# EAGLE board ppboard (EAGLE 6.5.0)
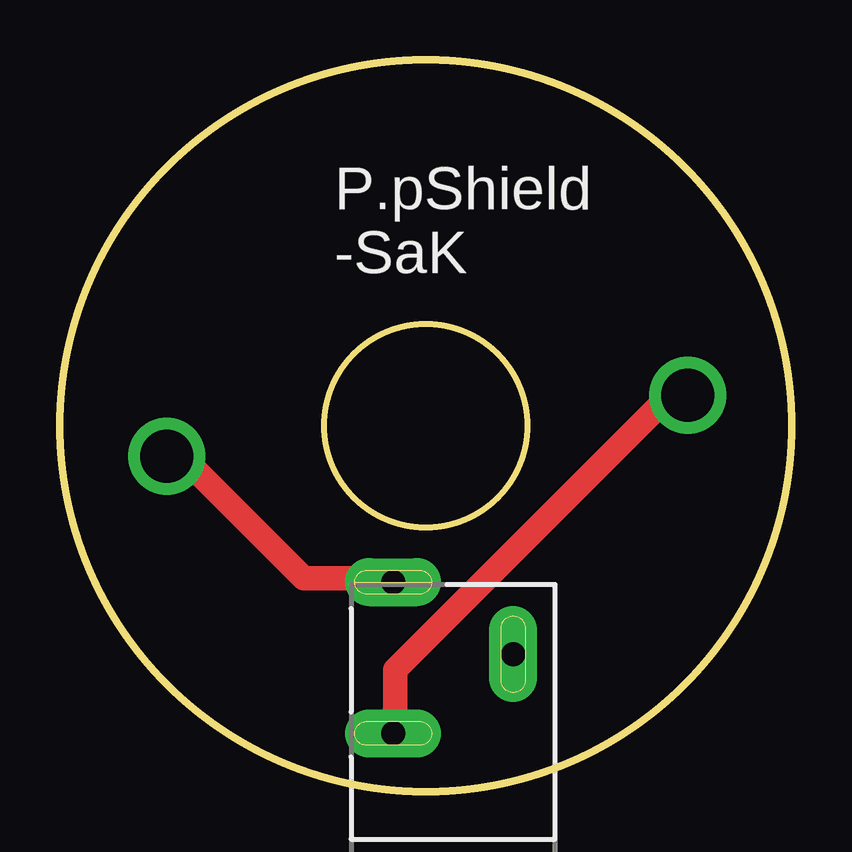
[diagram p0: board, top side]

Size 30.48 x 30.48 mm. Coordinates in mm from the lower left corner, seen from the top.
Outline: circle at 15.24,15.24 radius 15.24
Outline: circle at 15.24,15.24 radius 4.22
Copper layers (1*16): Top 0.035mm / dielectric 1.5mm / Bottom 0.035mm
Design rules "default": minimum track width 10mil, minimum drill 24mil, track to track 8mil, track to pad 8mil, pad to pad 8mil, via to via 8mil, smd to smd 8mil, copper to edge 40mil, drill to drill 8mil, minimum pad ring 10mil, minimum via ring 8mil, stop-mask expansion 4mil, vias tented up to drill 0mil, thermal gap 10mil

## Footprints (pad centres in the part's own frame; a part is rotated, then mirrored left to right if it is on the bottom)
POWER_JACK_SLOT = drill 1 pad 2 long: GND@1 2.58,7.5; GND@2 7.58,10.8; PWR 2.58,13.8

## Placement (x,y rotation side)
J1  POWER_JACKSLT  [POWER_JACK_SLOT]  11.3,-5.08 0 top

## Library data of the parts
J1 = SparkFun-Connectors; PROD_ID: PRT-00119

## Tracks (layer width: path | path; a pad name or v marks a point on that pad's centre or on a via)
N$3
  Top 1.016: 13.97,8.89 10.16,8.89 5.08,13.97
N$4
  Top 1.016: 13.97,2.54 13.97,5.08 25.4,16.51 26.67,16.51
N$5  (via drill 2.2)
  other vias: 26.16,16.51
N$6  (via drill 2.2)
  other vias: 4.45,13.97

## Text on the board
tPlace: P.pShield / -SaK